# EAGLE board schematic (EAGLE 8.7.0)
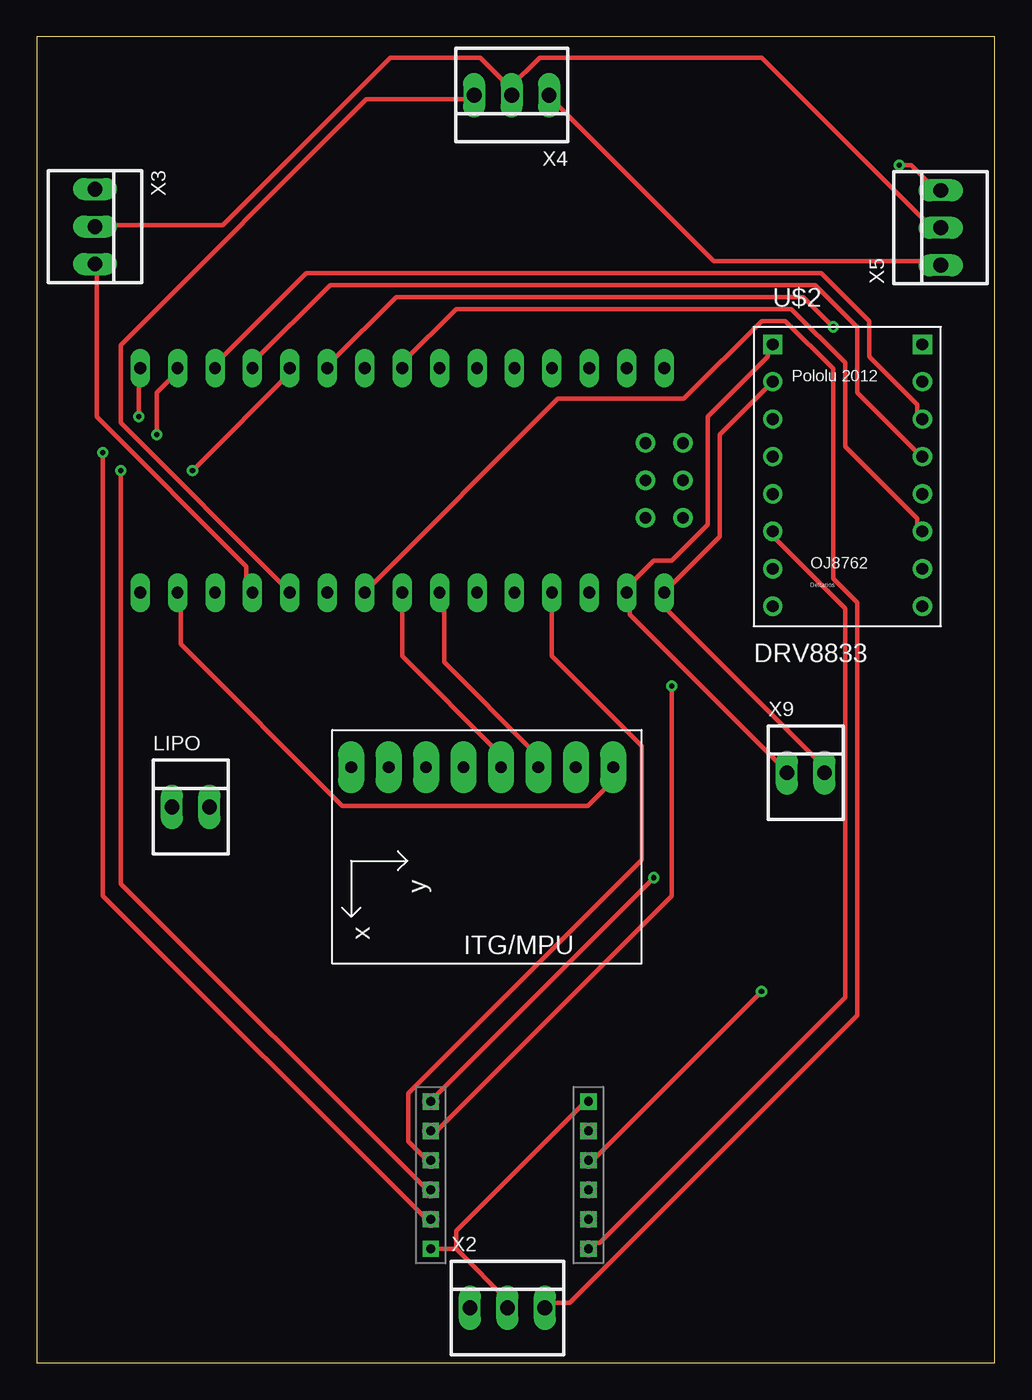
[diagram p0: board, top side]
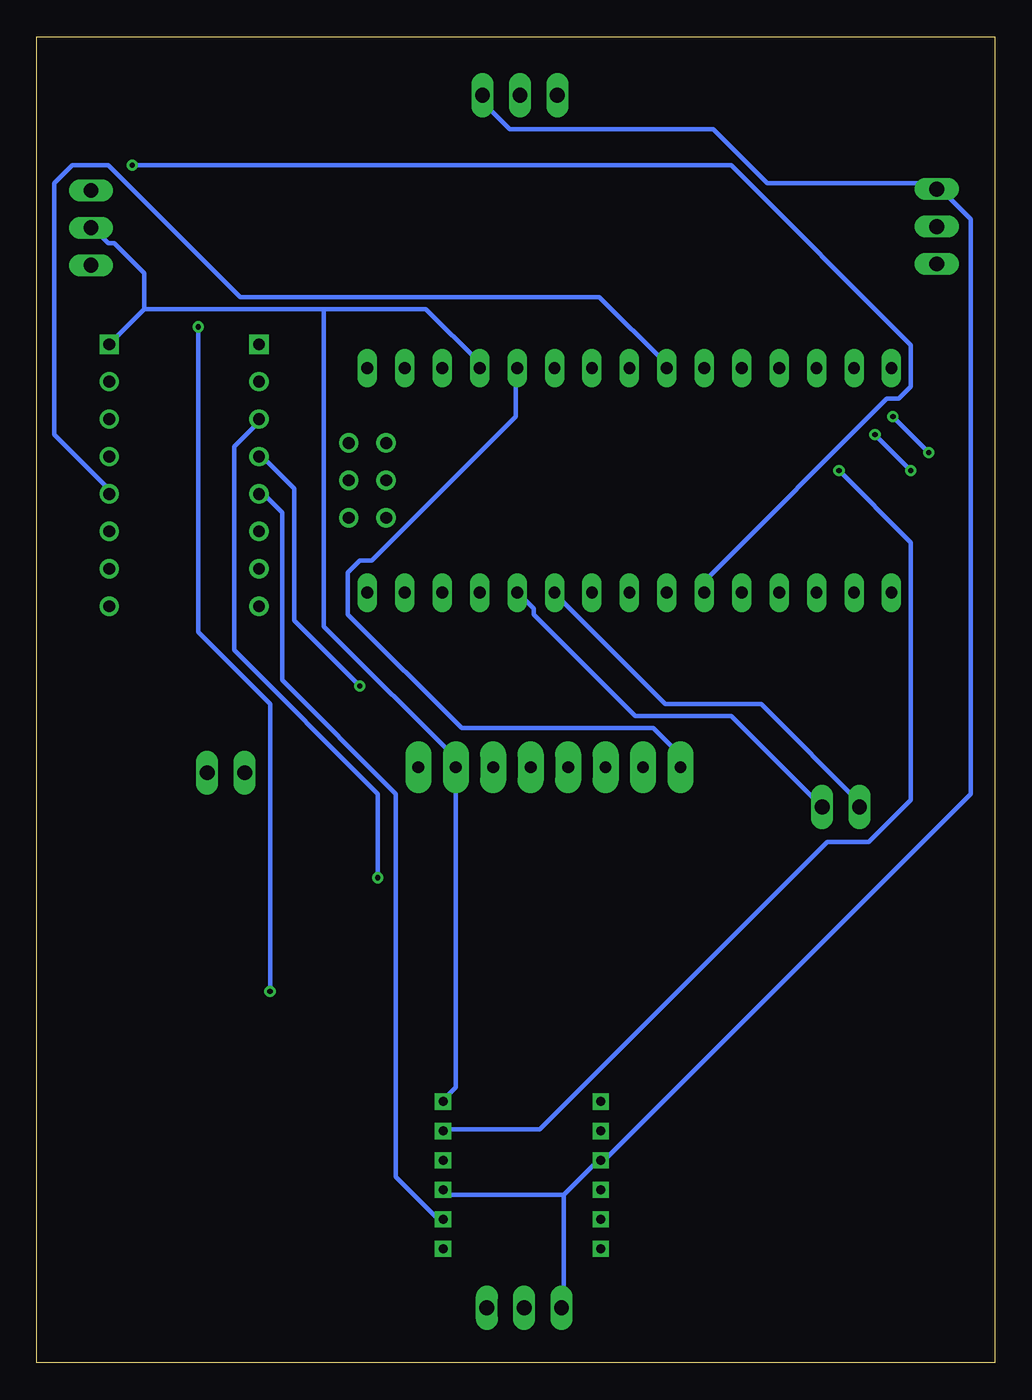
[diagram p1: board, bottom side, seen from below]

Size 65 x 90 mm. Coordinates in mm from the lower left corner, seen from the top.
Outline: 0,0 65,0 65,90 0,90 0,0
Copper layers (1*16): Top 0.035mm / dielectric 1.5mm / Bottom 0.035mm
Design rules "default *": minimum track width 12mil, minimum drill 0.35mm, track to track 12mil, track to pad 12mil, pad to pad 6mil, via to via 6mil, smd to smd 6mil, copper to edge 40mil, drill to drill 6mil, minimum pad ring 10mil, minimum via ring 8mil, stop-mask expansion 4mil, vias tented up to drill 0mil, thermal gap 10mil
Net classes: 0 default: width 0.254 mm, drill 0.254 mm, clearance 0.508 mm

## Footprints (pad centres in the part's own frame; a part is rotated, then mirrored left to right if it is on the bottom)
22-23-2021 = drill 1 long: 1 -1.27,0; 2 1.27,0
GY-521 = drill 0.8 pad 1.778 long: ADO -8.89,-6.35; GND -8.89,6.35; INT -8.89,-8.89; SCL -8.89,3.81; SDA -8.89,1.27; VCC -8.89,8.89; XCL -8.89,-3.81; XDA -8.89,-1.27
NANO = drill 0.8 long: 3.3V -10.16,24.13; 5V -10.16,-1.27; A0 -10.16,19.05; A1 -10.16,16.51; A2 -10.16,13.97; A3 -10.16,11.43; A4 -10.16,8.89; A5 -10.16,6.35; A6 -10.16,3.81; A7 -10.16,1.27; AREF -10.16,21.59; D2 5.08,1.27; D3 5.08,3.81; D4 5.08,6.35; D5 5.08,8.89; D6 5.08,11.43; D7 5.08,13.97; D8 5.08,16.51; D9 5.08,19.05; D10 5.08,21.59; D11 5.08,24.13; D12 5.08,26.67; D13 -10.16,26.67; GND -10.16,-6.35; GND1 5.08,-1.27; RAW -10.16,-8.89; RST -10.16,-3.81; RST1 5.08,-3.81; RX1 5.08,-6.35; TX0 5.08,-8.89 | drill 0.8: ICSP1 -5.08,-10.16; ICSP2 -5.08,-7.62; ICSP3 -2.54,-10.16; ICSP4 -2.54,-7.62; ICSP5 0,-10.16; ICSP6 0,-7.62
POLOLU-DRV8833 = drill 0.8: AISEN -3.81,-7.62; BINSEN -3.81,-10.16; FLT 6.35,-10.16; INA1 6.35,-5.08; INA2 6.35,-2.54; INB1 6.35,2.54; INB2 6.35,0; OA1 -3.81,-5.08; OA2 -3.81,-2.54; OB1 -3.81,2.54; OB2 -3.81,0; SLP 6.35,-7.62; VIN -3.81,5.08; VMM 6.35,5.08 | drill 0.8 square: GND1 -3.81,7.62; GND2 6.35,7.62
PINHEADER = drill 0.6 square: P$1 0.5,0.5; P$2 2.5,0.5; P$3 4.5,0.5; P$4 6.5,0.5; P$5 8.5,0.5; P$6 10.5,0.5
22-23-2031 = drill 1 long: 1 -2.54,0; 2 0,0; 3 2.54,0

## Placement (x,y rotation side)
LIPO  22-23-2021  [22-23-2021]  10.44,37.72 0 top
U1  GY-521MPU6050  [GY-521]  30.22,31.53 270 top
U$1  NANO  [NANO]  33.68,62.43 90 top
U$2  [POLOLU-DRV8833]  53.74,61.51 0 top
U$3  PINHEADER  [PINHEADER]  36.93,18.23 270 top
U$4  PINHEADER  [PINHEADER]  27.23,7.23 90 top
X2  22-23-2031  [22-23-2031]  31.93,3.72 0 top
X3  22-23-2031  [22-23-2031]  3.94,77.12 270 top
X4  22-23-2031  [22-23-2031]  32.22,86.04 180 top
X5  22-23-2031  [22-23-2031]  61.33,77.04 90 top
X9  22-23-2021  [22-23-2021]  52.17,40.04 0 top

## Library data of the parts
LIPO X9 = con-molex; MF: MOLEX; MPN: 22-23-2021; OC_FARNELL: 1462926; OC_NEWARK: 25C3832
U1 = gy-521
U$1 = Arduino-clone
U$2 = Pololu_Driver_DRV8833
U$3 U$4 = pololu encoder board
X2-X5 = con-molex; MF: MOLEX; MPN: 22-23-2031; OC_FARNELL: 1462950; OC_NEWARK: 30C0862

## Nets
ENC1A: U$1.D7 U$3.P$3
ENC1B: U$1.D8 U$3.P$2
ENC2A: U$1.D11 U$4.P$3
ENC2B: U$1.D12 U$4.P$2
GND: U1.GND U$1.GND1 U$2.GND2 U$3.P$1 U$4.P$1 X2.2 X3.2 X4.2 X5.2
MA1: U$1.D5 U$2.INA1
MA2: U$1.D6 U$2.INA2
MB1: U$1.D10 U$2.INB1
MB2: U$1.D9 U$2.INB2
N$3: LIPO.1 U$1.A6
N$4: LIPO.2 U$1.A7
N$5: U1.VCC U$1.3.3V
N$6: U1.SCL U$1.A5
N$7: U1.SDA U$1.A4
N$8: U$2.OA2 U$3.P$5
N$9: U$1.GND U$2.GND1 X9.1
N$10: U$1.RAW U$2.VIN X9.2
N$11: U$2.OA1 U$3.P$6
N$12: U$2.OB2 U$4.P$5
N$13: U$2.OB1 U$4.P$6
N$14: U1.INT U$1.D2
SENSOR1: U$1.A0 X3.3
SENSOR2: U$1.A1 X4.3
SENSOR3: U$1.A2 X5.3
SENSORBACK: U$1.A3 X2.3
VCC: U$1.5V U$3.P$4 U$4.P$4 X2.1 X3.1 X4.1 X5.1

## Tracks (layer width: path | path; a pad name or v marks a point on that pad's centre or on a via)
ENC1A  (via drill 0.35)
  Top 0.305: v49.17,25.2 37.8,13.82 U$3.P$3 | v54.05,70.31 52.02,72.34 24.38,72.34 19.91,67.87 U$1.D7
  Bottom 0.305: v49.17,25.2 49.17,44.7 54.05,49.58 v54.05,70.31
ENC1B  (via drill 0.35)
  Top 0.305: v10.57,60.55 17.48,67.46 U$1.D8
  Bottom 0.305: v10.57,60.55 5.69,55.68 5.69,38.2 8.53,35.36 11.38,35.36 30.89,15.85 37.39,15.85 U$3.P$2
ENC2A  (via drill 0.35)
  Top 0.305: v5.69,60.55 5.69,32.51 26.42,11.79 U$4.P$3 | v8.13,62.99 8.13,65.84 9.75,67.46 U$1.D11
  Bottom 0.305: v8.13,62.99 v5.69,60.55
ENC2B  (via drill 0.35)
  Top 0.305: v4.47,61.77 4.47,31.7 26.42,9.75 U$4.P$2 | v6.91,64.21 6.91,67.46 U$1.D12
  Bottom 0.305: v6.91,64.21 v4.47,61.77
GND
  Top 0.305: 32.11,86.56 32.51,86.16 X4.2 32.11,86.56 | 32.11,86.56 30.07,88.59 23.98,88.59 12.6,77.22 4.06,77.22 X3.2 | 28.45,7.72 26.82,7.72 U$4.P$1 | 28.45,7.72 32.11,4.06 X2.2 | 28.45,7.72 28.45,8.94 36.98,17.48 37.39,17.48 U$3.P$1 | 32.11,86.56 34.14,88.59 49.17,88.59 60.96,76.81 X5.2
  Bottom 0.305: 57.71,71.53 45.52,71.53 | 45.52,71.53 38.61,71.53 34.95,67.87 U$1.GND1 | 57.71,71.53 59.74,69.49 U$2.GND2 | 57.71,71.53 57.71,73.97 59.74,76 60.15,76 60.96,76.81 X5.2 | U$3.P$1 37.39,17.88 36.58,18.69 36.58,40.23 U1.GND 36.17,40.64 45.52,49.99 45.52,71.53
MA1
  Top 0.305: U$2.INA1 59.74,56.49 59.74,57.3 54.86,62.18 54.86,67.87 51.21,71.53 28.45,71.53 24.79,67.87 U$1.D5
MA2
  Bottom 0.305: U$2.INA2 60.15,59.33 63.8,62.99 63.8,80.06 62.59,81.28 60.15,81.28 51.21,72.34 26.82,72.34 22.35,67.87 U$1.D6
MB1
  Top 0.305: U$2.INB1 59.74,64.21 59.74,65.02 56.49,68.28 56.49,70.71 53.24,73.97 18.29,73.97 12.19,67.87 U$1.D10
MB2
  Top 0.305: U$2.INB2 59.74,61.77 55.68,65.84 55.68,70.31 52.83,73.15 19.91,73.15 14.63,67.87 U$1.D9
N$3
  Bottom 0.305: U$1.A6 29.67,52.02 22.35,44.7 15.85,44.7 8.94,37.8 LIPO.1
N$4
  Bottom 0.305: U$1.A7 32.11,52.02 31.29,51.21 31.29,50.8 24.38,43.89 17.88,43.89 11.79,37.8 LIPO.2
N$5
  Top 0.305: U$1.3.3V 9.75,52.02 9.75,48.77 20.73,37.8 37.39,37.8 39.01,39.42 39.01,40.23 U1.VCC
N$6
  Top 0.305: U$1.A5 27.64,52.02 27.64,47.55 33.73,41.45 33.73,40.64 U1.SCL
N$7
  Top 0.305: U$1.A4 24.79,52.02 24.79,47.95 31.29,41.45 31.29,40.64 U1.SDA
N$8
  Bottom 0.305: U$3.P$5 37.8,9.75 40.64,12.6 40.64,38.61 48.36,46.33 48.36,57.71 49.58,58.93 U$2.OA2
N$9
  Top 0.305: X9.1 50.8,40.23 40.23,50.8 40.23,52.02 U$1.GND 39.83,52.43 41.86,54.46 43.08,54.46 45.52,56.9 45.52,64.21 49.58,68.28 49.58,69.09 U$2.GND1
N$10
  Top 0.305: X9.2 53.65,40.23 42.67,51.21 42.67,52.02 U$1.RAW 42.67,52.43 46.33,56.08 46.33,62.99 49.58,66.24 U$2.VIN
N$11
  Top 0.305: U$3.P$6 37.8,8.13 38.2,8.13 54.86,24.79 54.86,51.21 49.99,56.08 U$2.OA1
N$12  (via drill 0.35)
  Top 0.305: v43.08,45.92 43.08,31.7 27.23,15.85 26.82,15.85 U$4.P$5
  Bottom 0.305: v43.08,45.92 47.55,50.39 47.55,59.33 49.58,61.37 U$2.OB2
N$13  (via drill 0.35)
  Top 0.305: v41.86,32.92 26.82,17.88 U$4.P$6
  Bottom 0.305: v41.86,32.92 41.86,38.61 51.61,48.36 51.61,62.18 49.99,63.8 U$2.OB1
N$14
  Bottom 0.305: U$1.D2 32.51,67.46 32.51,64.21 42.27,54.46 43.08,54.46 43.89,53.65 43.89,50.8 36.17,43.08 23.16,43.08 21.54,41.45 21.54,40.64 U1.INT
SENSOR1
  Top 0.305: U$1.A0 14.22,52.43 14.22,54.05 4.06,64.21 4.06,74.37 X3.3
SENSOR2
  Top 0.305: U$1.A1 17.07,52.43 5.69,63.8 5.69,69.09 22.35,85.75 29.67,85.75 X4.3
SENSOR3  (via drill 0.35)
  Top 0.305: v58.52,81.28 59.33,81.28 60.96,79.65 X5.3
  Bottom 0.305: v58.52,81.28 17.88,81.28 5.69,69.09 5.69,66.24 6.5,65.43 7.32,65.43 19.51,53.24 19.51,52.43 U$1.A2
SENSORBACK
  Top 0.305: U$1.A3 22.35,52.43 35.36,65.43 43.89,65.43 49.17,70.71 50.8,70.71 54.05,67.46 54.05,53.24 55.68,51.61 55.68,23.57 36.17,4.06 34.54,4.06 X2.3
VCC
  Top 0.305: U$1.5V 34.95,52.02 34.95,47.95 41.05,41.86 41.05,34.14 25.2,18.29 25.2,15.04 26.42,13.82 U$4.P$4 | X5.1 60.96,74.78 45.92,74.78 34.95,85.75 X4.1
  Bottom 0.305: 29.26,11.38 27.23,13.41 26.82,13.41 U$4.P$4 26.42,13.82 1.63,38.61 1.63,77.62 3.66,79.65 X3.1 4.06,80.06 15.44,80.06 19.1,83.72 32.92,83.72 34.95,85.75 X4.1 | 29.26,11.38 29.26,4.06 X2.1 | 29.26,11.38 37.39,11.38 U$3.P$4